# Altium PCB B&D-A Power.PcbDoc
Units mil, origin at the board's own origin, x right, y up, seen from the top; angles counter-clockwise.
Board outline 3300 x 1750 mil, 2 copper layers (TopLayer, BottomLayer); 38 components, 25 nets, 143 pads, 0 vias.
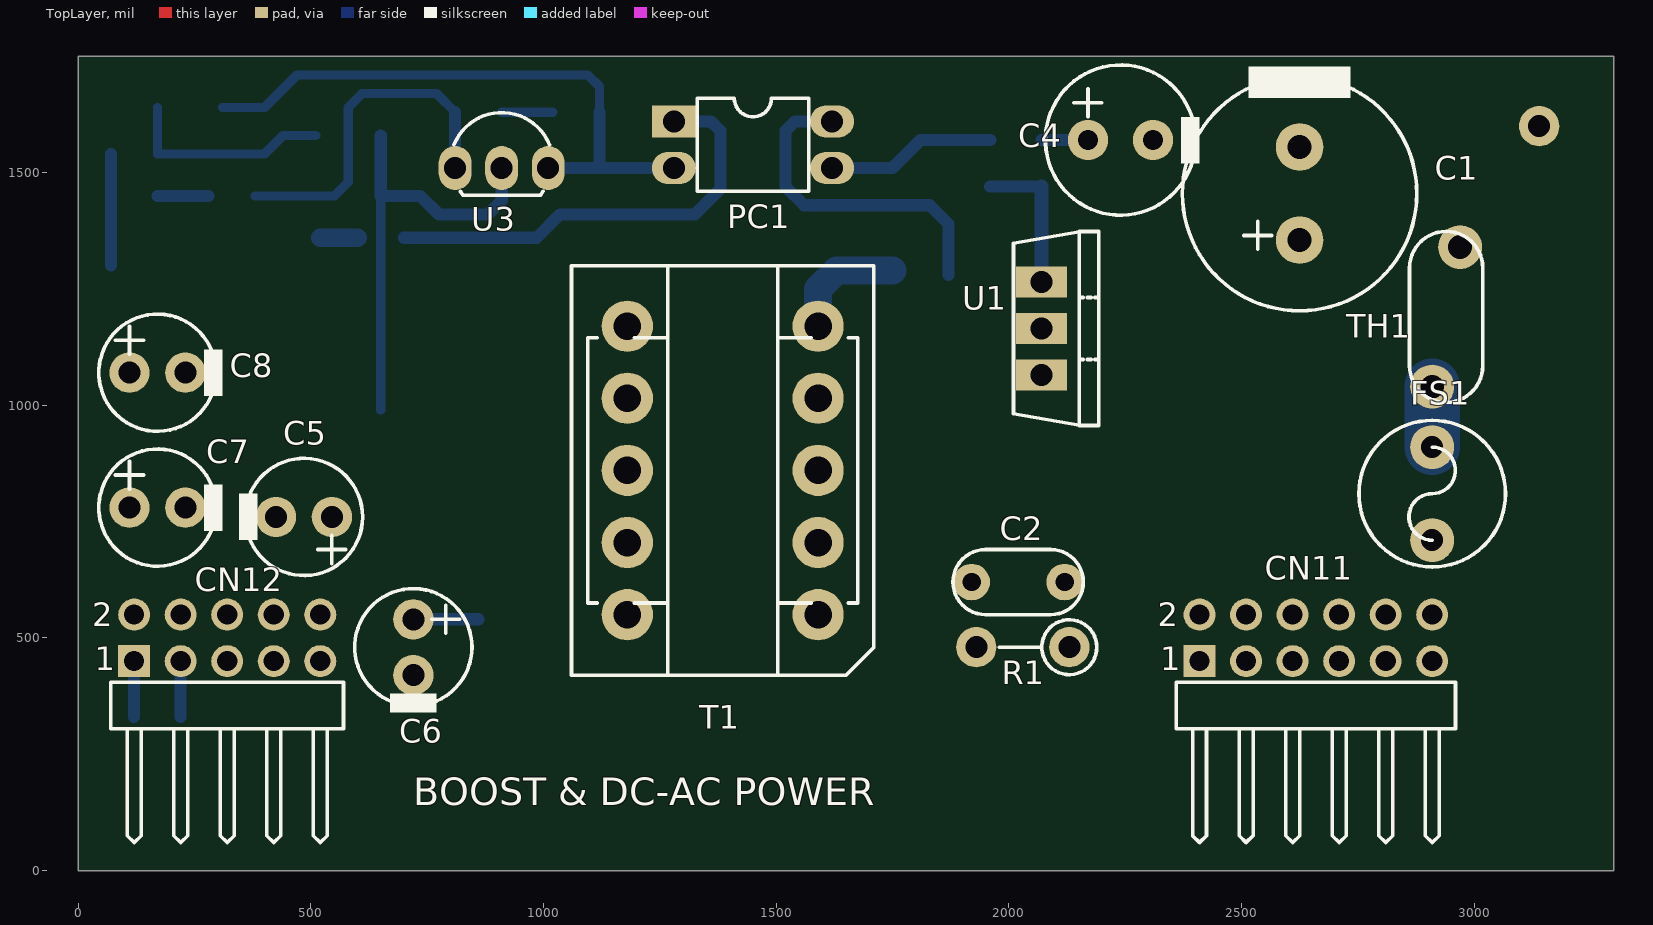
[diagram p0: TopLayer view]
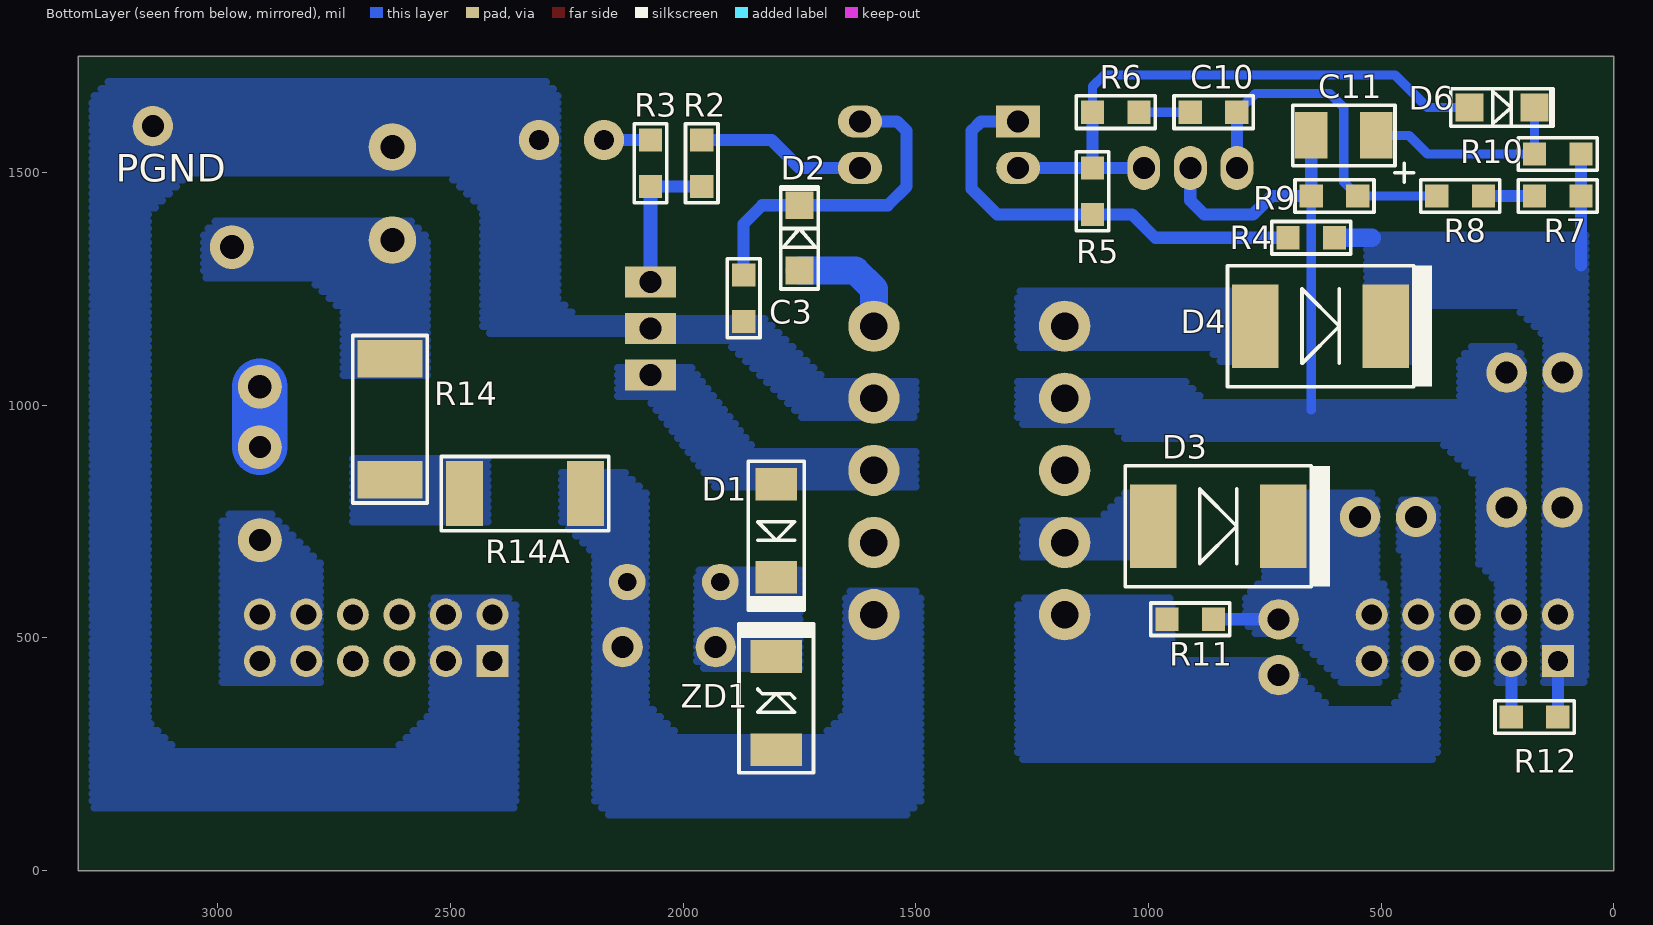
[diagram p1: BottomLayer view, seen from below]

## Layer stack, top to bottom
TopSolder: solder mask 0.4, Solder Resist, Dk 3.5
TopLayer: signal copper 1.4
Dielectric1: dielectric 12.6, FR-4, Dk 4.8
BottomLayer: signal copper 1.4
BottomSolder: solder mask 0.4, Solder Resist, Dk 3.5

## Board outline
0,0 0,1750 3300,1750 3300,0

## Design rules (kind name [scope] priority, off if disabled: settings)
Clearance [All] p1: gap=10 ignorepadtopadclearanceinfootprint=FALSE
FabricationTestPointUsage TestPointUsage [All] p1: valid=0 allowmultiple=FALSE
FabricationTestpoint Testpoint [All] p1: side=3 testpointundercomponent=TRUE minsize=40 maxsize=100 preferedsize=60 minholesize=20 maxholesize=40 preferedholesize=32 testpointgrid=1 allowsidetop=TRUE allowsidebottom=TRUE usegrid=TRUE gridtolerance=0.01
PolygonConnect PolygonConnect_1 [All] p1: connectstyle=Relief reliefconductorwidth=10 reliefentries=4 polygonreliefangle="90 Angle" airgapwidth=10
PolygonConnect [All] p2: connectstyle=Direct reliefconductorwidth=10 reliefentries=4 polygonreliefangle="90 Angle" airgapwidth=10
RoutingVias [All] p1: holewidth=28 width=50 viastyle="Through Hole" minholewidth=28 minwidth=50 maxholewidth=28 maxwidth=50
SolderMaskExpansion [All] p1: expansion=4
Width [All] p1: maxlimit=200 minlimit=10 preferedwidth=26
28 further rules are at their usual default settings.

## Classes and differential pairs
component class 820-1IN&OUT: C1 C2 C3 C4(NM) C5(NM) C6(NM) CN3 CN5 CN6 CN11 CN12 CT1 CT2 CT3 D1 D2 PT1 PT2 PT3 R1 R2 R3 R6 R7 R7(NM) RY1 RY2

## Components (designator, comment, footprint, x,y, rotation, side; value= is the part's Value field where it differs from the comment)
C1 "22/400V" "CAP P D12.8/5.08" 2625,1455 r90 top
C2 "4700P/1kV" "CAP 7.0*3.5/5.08" 2020,620 r180 top
C3 "0.1U" 2012(0805)-2.54 1870,1230 r270 bottom
C4 "47/16V" "CAP P D8.2/3.56" 2240,1570 r0 top
C5 "100/25V" "CAP P D6.4/3.05" 485,760 r180 top
C6 "100/25V" "CAP P D6.4/3.05" 720,480 r270 top
C7 "100/25V" "CAP P D6.4/3.05" 170,780 r0 top
C8 "100/25V" "CAP P D6.4/3.05" 170,1070 r0 top
C10 "0.1U" 2012(0805)-2.54 860,1630 r180 bottom
C11 "10/16V" "CAP P 3528" 580,1580 r0 bottom
CN11 "PIN HDR 2*6-90" "PIN HDR 2*6-90" 2660,500 r0 top
CN12 "PIN HDR 2*5-90" "PIN HDR 2*5-90" 320,500 r0 top
D1 "ES1J" D5025 1800,730 r270 bottom
D2 "1N4148" D3515 1750,1360 r90 bottom
D3 "SS36(S6 31)" D7060 850,740 r180 bottom
D4 "SS36(S6 31)" D7060 630,1170 r180 bottom
D6 "1N4148" D3515 240,1640 r180 bottom
FS1 "3A/250V" "FUSE D8/5.08" 2910,810 r90 top
PC1 "PC817-1" DIP-4-340 1450,1560 r270 top
R1 "62K/1W" "RES D3.0/5.08" 2030,480 r180 top
R2 "22" 2012(0805)-2.54 1960,1520 r270 bottom
R3 "10" 2012(0805)-2.54 2070,1520 r90 bottom
R4 "100" 2012(0805)-2.54 650,1360 r180 bottom
R5 "1K" 2012(0805)-2.54 1120,1460 r270 bottom
R6 "3.3K" 2012(0805)-2.54 1070,1630 r0 bottom
R7 "10K" 2012(0805)-2.54 120,1450 r180 bottom
R8 "510" 2012(0805)-2.54 330,1450 r180 bottom
R9 "2.49K" 2012(0805)-2.54 600,1450 r180 bottom
R10 "10K" 2012(0805)-2.54 120,1540 r0 bottom
R11 "2K" 2012(0805)-2.54 910,540 r180 bottom
R12 "2K" 2012(0805)-2.54 170,330 r180 bottom
R14 "47" 6432(2512)-6.6 2630,970 r270 bottom
R14A "47" 6432(2512)-6.6 2340,810 r180 bottom
T1 "FEE-22-10" FEE-22-10/10.4*15.7 1590,550 r180 top
TH1 "10D-9" "TH 9.4*4/7.62*1.52" 2940,1190 r90 top
U1 "TOP225YN" TO-220_1 2070,1165 r270 top
U3 "TL431" TO-92_1 910,1510 r0 top
ZD1 "P6SMB200A" DZ5035 1800,360 r90 bottom

## Footprints (in the part's own frame and the unit in brackets; to place one, negate y for a bottom-side part, rotate by r counter-clockwise, add the part's x,y. Pads: shape width x height; smd on the part's side, far side on the other; paste and mask are expansions set on the pad)
2012(0805)-2.54 [mm]
  rect 1.27x1.27 smd: 1(-1.27,0) 2(1.27,0)
  round 0.3 on Mech4: ""(0,0)
  silkscreen extent -2.16,-0.89 2.16,0.89
6432(2512)-6.6 [mil]
  rect 80x140 smd: 1(-130,0) 2(130,0)
  round 11.81 on Mech4: ""(0,0)
  silkscreen extent -180,-80 180,80
"CAP 7.0*3.5/5.08" [mm]
  round 2 hole 1: 1(-2.54,0) 2(2.54,0)
  round 0.3 on Mech4: ""(0,0)
  silkscreen extent -3.56,-1.78 3.56,1.78
"CAP P 3528" [mil]
  rect 70x100 smd: 1(-70,0) 2(70,0)
  round 11.81 on Mech4: ""(0,0)
  silkscreen extent -150,-65 110,100
"CAP P D6.4/3.05" [mm]
  round 2.2 hole 1.2: 1(-1.524,0) 2(1.524,0)
  round 0.3 on Mech4: ""(0,0)
  silkscreen extent -3.2,-3.2 3.56,3.2
"CAP P D8.2/3.56" [mm]
  round 2.2 hole 1.1: 1(-1.778,0) 2(1.778,0)
  round 0.3 on Mech4: ""(0,0)
  silkscreen extent -4.1,-4.1 4.32,4.1
"CAP P D12.8/5.08" [mm]
  round 2.6 hole 1.3: 1(-2.54,0) 2(2.54,0)
  round 0.3 on Mech4: ""(0,0)
  silkscreen extent -6.4,-6.4 6.94,6.4
D3515 [mil]
  rect 60x60 smd: 1(-70,0) 2(70,0)
  round 11.81 on Mech4: ""(0,0)
  silkscreen extent -110,-40 110,40
D5025 [mil]
  rect 70x90 smd: 1(-100,0) 2(100,0)
  round 11.81 on Mech4: ""(0,0)
  silkscreen extent -150,-60 170,60
D7060 [mil]
  rect 100x180 smd: 1(-140,0) 2(140,0)
  round 11.81 on Mech4: ""(0,0)
  silkscreen extent -200,-130 240,130
DIP-4-340 [mm]
  rect 1.75x2.4 hole 1.2: 1(-1.27,-4.318)
  oval 1.75x2.4 hole 1.2: 2(1.27,-4.318) 3(1.27,4.318) 4(-1.27,4.318)
  round 0.3 on Mech4: ""(0,0)
  silkscreen extent -2.54,-3.05 2.54,3.05
DZ5035 [mil]
  rect 70x110 smd: 1(-100,0) 2(100,0)
  round 11.81 on Mech4: ""(0,0)
  silkscreen extent -150,-80 170,80
FEE-22-10/10.4*15.7 [mm]
  round 2.8 hole 1.5: 1(0,0) 2(0,-3.937) 3(0,-7.874) 4(0,-11.811) 5(0,-15.748) 6(10.414,-15.748) 7(10.414,-11.811) 8(10.414,-7.874) 9(10.414,-3.937) 10(10.414,0)
  round 0.3 on Mech4: ""(5.207,-7.874)
  silkscreen extent -3.05,-19.05 13.46,3.3
"FUSE D8/5.08" [mm]
  round 2.4 hole 1.2: 1(-2.54,0) 2(2.54,0)
  round 0.3 on Mech4: ""(0,0)
  silkscreen extent -4,-4 4,4
"PIN HDR 2*5-90" [mm]
  rect 1.75x1.75 hole 1.1: 1(-5.08,-1.27)
  round 1.75 hole 1.1: 2(-5.08,1.27) 3(-2.54,-1.27) 4(-2.54,1.27) 5(0,-1.27) 6(0,1.27) 7(2.54,-1.27) 8(2.54,1.27) 9(5.08,-1.27) 10(5.08,1.27)
  round 0.3 on Mech4: ""(0,0)
  silkscreen extent -6.35,-11.18 6.35,-2.41
"PIN HDR 2*6-90" [mm]
  rect 1.75x1.75 hole 1.1: 1(-6.35,-1.27)
  round 1.75 hole 1.1: 2(-6.35,1.27) 3(-3.81,-1.27) 4(-3.81,1.27) 5(-1.27,-1.27) 6(-1.27,1.27) 7(1.27,-1.27) 8(1.27,1.27) 9(3.81,-1.27) 10(3.81,1.27) 11(6.35,-1.27) 12(6.35,1.27)
  round 0.3 on Mech4: ""(0,0)
  silkscreen extent -7.62,-11.18 7.62,-2.41
"RES D3.0/5.08" [mm]
  round 2.2 hole 1.2: 1(-2.54,0) 2(2.54,0)
  round 0.3 on Mech4: ""(0,0)
  silkscreen extent -4.04,-1.5 1.27,1.5
"TH 9.4*4/7.62*1.52" [mm]
  round 2.4 hole 1.3: 1(-3.81,0.762) 2(3.81,-0.762)
  round 0.3 on Mech4: ""(0,0)
  silkscreen extent -4.67,-2 4.67,2
TO-92_1 [mm]
  oval 1.8x2.4 hole 1.2: 1(-2.54,0) 2(0,0) 3(2.54,0)
  silkscreen extent -2.61,-1.48 2.61,3.02
TO-220_1 [mm]
  rect 1.7x2.8 hole 1.2: 1(-2.54,0) 2(0,0) 3(2.54,0)
  silkscreen extent -5.29,-1.52 5.29,3.13

## Free pads (board coordinates)
  round 86.61 hole 47.24: 0(3140,1600)

## Nets (pads, with @x,y where several pads share a name; then routed paths per layer and width w, separated by ;. In a path a pad name is that pad's centre, name@x,y a point inside that pad or via, vN(x,y) a via of type N, cw(c..) or ccw(c..) an arc to the next point about the centre after c; other vN are vias at no path point)
+12V1: C7.1 C8.1 CN12.1 CN12.2 D4.2 R4.2 R7.2 R10.1 R12.2 | length 440
  BottomLayer w26: 70,1300 R10.1 ; R12.2 CN12.1
  BottomLayer w40: 520,1360 R4.2
+12V2: C5.1 C6.1 CN12.9 CN12.10 D3.2 R11.2 | length 140
  BottomLayer w26: C6.1 R11.2
+VH: CN11.9 CN11.10 CN11.11 CN11.12 FS1.1
GND: C7.2 C8.2 C11.2 CN12.3 CN12.4 R9.1 R12.1 T1.7 U3.2 | length 1069
  BottomLayer w20: 650,990 R9.1
  BottomLayer w26: R12.1 CN12.3 ; C11.2 R9.1 735,1450 775,1410 880,1410 910,1440 U3.2
NetC4_1: C4.1 R3.2 | length 130
  BottomLayer w26: R3.2 C4.1@2200,1570
NetD2_1: D2.1 T1.5 | length 256.6
  BottomLayer w60: T1.5 1590,1250 1630,1290 D2.1
NetD6_1: D6.1 PC1.2 R5.1 R6.2 U3.3 | length 1294.4
  BottomLayer w20: D6.1 400,1640 470,1710 1095,1710 1120,1685 R6.2
  BottomLayer w26: U3.3 PC1.2 ; R5.1 R6.2
NetFS1_2: FS1.2 TH1.1 | length 130
  BottomLayer w120: FS1.2 TH1.1
NetPC1_4: C3.1 D2.2 PC1.4 | length 721.4
  BottomLayer w26: PC1.4 1540,1610 1520,1590 1520,1470 1560,1430 1830,1430 1870,1390 C3.1
NetR1_2: C2.2 D1.2 R1.2 ZD1.2
NetR2_1: PC1.3 R2.1 | length 364.9
  BottomLayer w26: PC1.3 1750,1510 1810,1570 R2.1
NetR4_1: PC1.1 R4.1 R5.2 | length 956.8
  BottomLayer w26: R4.1 985,1360 1035,1410 1325,1410 1380,1465 1380,1590 1360,1610 PC1.1
NetR6_1: C10.1 R6.1 | length 110
  BottomLayer w20: C10.1 R6.1
NetR7_1: R7.1 R8.2 | length 110
  BottomLayer w26: R7.1 R8.2
NetR10_2: C11.1 D6.2 R10.2 | length 456.6
  BottomLayer w20: D6.2 R10.2 400,1540 440,1580 C11.1
NetR14_2: R14.2 R14A.1
NetR14A_2: C2.1 R1.1 R14A.2 T1.1 ZD1.1
NetT1_6: D4.1 T1.6
NetT1_9: D3.1 T1.9
NetTH1_2: C1.1 R14.1 TH1.2
NetU1_1: R2.2 R3.1 U1.1 | length 315
  BottomLayer w26: R2.2 R3.1
  BottomLayer w30: U1.1 R3.1
NetU1_3: D1.1 T1.3 U1.3
NetU3_1: C10.2 R8.1 R9.2 U3.1 | length 751.4
  BottomLayer w20: R8.1 R9.2 580,1480 580,1640 610,1670 770,1670 C10.2
  BottomLayer w26: U3.1 C10.2
PGND: C1.2 C3.2 C4.2 CN11.1 CN11.2 CN11.3 CN11.4 pad.0 T1.4 U1.2
SGND: C5.2 C6.2 CN12.7 CN12.8 R11.1 T1.10
pads on no net: C1. C2. C3. C4. C5. C6. C7. C8. C10. C11. CN11. CN11.5 CN11.6 CN11.7 CN11.8 CN12. CN12.5 CN12.6 D1. D2. D3. D4. D6. FS1. PC1. R1. R2. R3. R4. R5. R6. R7. R8. R9. R10. R11. R12. R14. R14A. T1. T1.2 T1.8 TH1. ZD1.

## Polygon pours and split planes (outlines as drawn)
PGND on BottomLayer "BottomLayer-PGND" (hatched Horizontal grid 15 track 17, pour order 30): 1510,970 1740,970 1910,1140 2020,1140 2020,1190 1830,1190 1700,1060 1510,1060 1500,1050 1500,980
+VH on BottomLayer "BottomLayer-+VH" (hatched Horizontal grid 15 track 17, pour order 28): 2780,400 2780,660 2890,770 2970,770 2990,750 2990,400 2980,390 2790,390
NetR14_2 on BottomLayer "BottomLayer-NetR14_2" (hatched Horizontal grid 15 track 17, pour order 26): 2420,890 2420,740 2710,740 2710,890
NetTH1_2 on BottomLayer "BottomLayer-NetTH1_2" (hatched Horizontal grid 15 track 17, pour order 24): 3010,1260 2790,1260 2730,1200 2730,1060 2550,1060 2550,1360 2600,1410 2990,1410 3030,1370 3030,1280
+12V1 on BottomLayer "BottomLayer-+12V1" (hatched Horizontal grid 15 track 17, pour order 22): 530,1090 430,1090 430,1180 400,1210 60,1210 60,1380 530,1380
PGND on BottomLayer "BottomLayer-PGND 1" (hatched Horizontal grid 15 track 17, pour order 20): 3090,260 2620,260 2540,340 2540,580 2520,600 2390,600 2360,570 2360,140 2380,120 3150,120 3150,320
NetR1_2 on BottomLayer "BottomLayer-NetR1_2" (hatched Horizontal grid 15 track 17, pour order 18): 1970,640 1970,450 1950,430 1750,430 1750,650 1760,660 1950,660
NetR14A_2 on BottomLayer "BottomLayer-NetR14A_2" (hatched Horizontal grid 15 track 17, pour order 16): 2260,750 2260,870 2140,870 2080,810 2080,360 2010,290 1700,290 1650,340 1650,590 1630,610 1510,610 1490,590 1490,150 1530,110 2150,110 2190,150 2190,680
+12V1 on BottomLayer "BottomLayer-+12V1 1" (hatched Horizontal grid 15 track 17, pour order 14): 150,400 145,1145 210,1210 60,1210 60,410 70,400
NetU1_3 on BottomLayer "BottomLayer-NetU1_3" (hatched Horizontal grid 15 track 17, pour order 12): 2140,1090 1990,1090 1850,910 1510,910 1500,900 1500,820 1510,810 1920,810 2080,1020 2140,1020
GND on BottomLayer "BottomLayer-GND" (hatched Horizontal grid 15 track 17, pour order 10): 1270,1060 930,1060 880,1010 330,1010 330,1100 300,1130 220,1130 195,1105 195,400 250,400 250,620 290,660 290,840 370,920 1040,920 1080,960 1270,960 1280,970 1280,1050
NetT1_6 on BottomLayer "BottomLayer-NetT1_6" (hatched Horizontal grid 15 track 17, pour order 8): 1270,1120 870,1120 840,1090 730,1090 730,1250 1270,1250 1280,1240 1280,1130
NetT1_9 on BottomLayer "BottomLayer-NetT1_9" (hatched Horizontal grid 15 track 17, pour order 6): 960,820 1040,820 1100,760 1260,760 1270,750 1270,670 1260,660 960,660
PGND on BottomLayer "BottomLayer-PGND 2" (hatched Horizontal grid 15 track 17, pour order 4): 3150,120 3150,1410 3060,1500 2510,1500 2430,1420 2430,1170 2400,1140 2020,1140 2020,1190 2230,1190 2270,1230 2270,1670 2300,1700 3230,1700 3270,1660 3270,140 3250,120
+12V2 on BottomLayer "BottomLayer-+12V2" (hatched Horizontal grid 15 track 17, pour order 2): 750,630 790,590 790,530 760,500 680,500 580,400 510,400 490,420 490,610 510,630 510,800 530,820 750,820
SGND on BottomLayer "BottomLayer-SGND" (hatched Horizontal grid 15 track 17, pour order 0): 1250,600 970,600 950,580 950,450 710,450 610,350 480,350 450,380 450,680 460,690 460,790 440,810 400,810 380,790 380,250 400,230 1260,230 1280,250 1280,570

## Silkscreen, mask and mechanical layers (free items; w line width, h text height)
TopOverlay:
  text "BOOST & DC-AC POWER" at 720,140 h60
BottomOverlay:
  text "PGND" at 3220,1480 h60
Mechanical1:
  the board outline again, w10
Mechanical2:
  lines w10: 0,1810 0,1890 ; 60,1830 0,1850 ; 60,1870 0,1850 ; 1475.32,1850 0,1850 ; 1824.68,1850 3300,1850 ; 3240,1830 3300,1850 ; 3240,1870 3300,1850 ; 3300,1810 3300,1890 ; 3360,0 3440,0 ; 3360,1750 3440,1750 ; 3380,60 3400,0 ; 3380,1690 3400,1750 ; 3400,705.03 3400,0 ; 3400,1044.97 3400,1750 ; 3420,60 3400,0 ; 3420,1690 3400,1750
  text "3300mil" at 1485.32,1812.58 h60
  text "1750mil" at 3437.42,715.03 h60 r90

## Text inside footprints (layer, text, board x,y; h text height)
CN11: TopOverlay "2" at 2320,525 h50; TopOverlay "1" at 2325,430 h50
CN12: TopOverlay "1" at 35,430 h50; TopOverlay "2" at 30,525 h50